# Altium PCB CTH1000.PCBDOC
Units mm, origin at the board's own origin, x right, y up, seen from the top; angles counter-clockwise.
Board outline 50.03 x 82.03 mm, 2 copper layers (TopLayer, BottomLayer); 84 components, 139 nets, 383 pads, 83 vias.
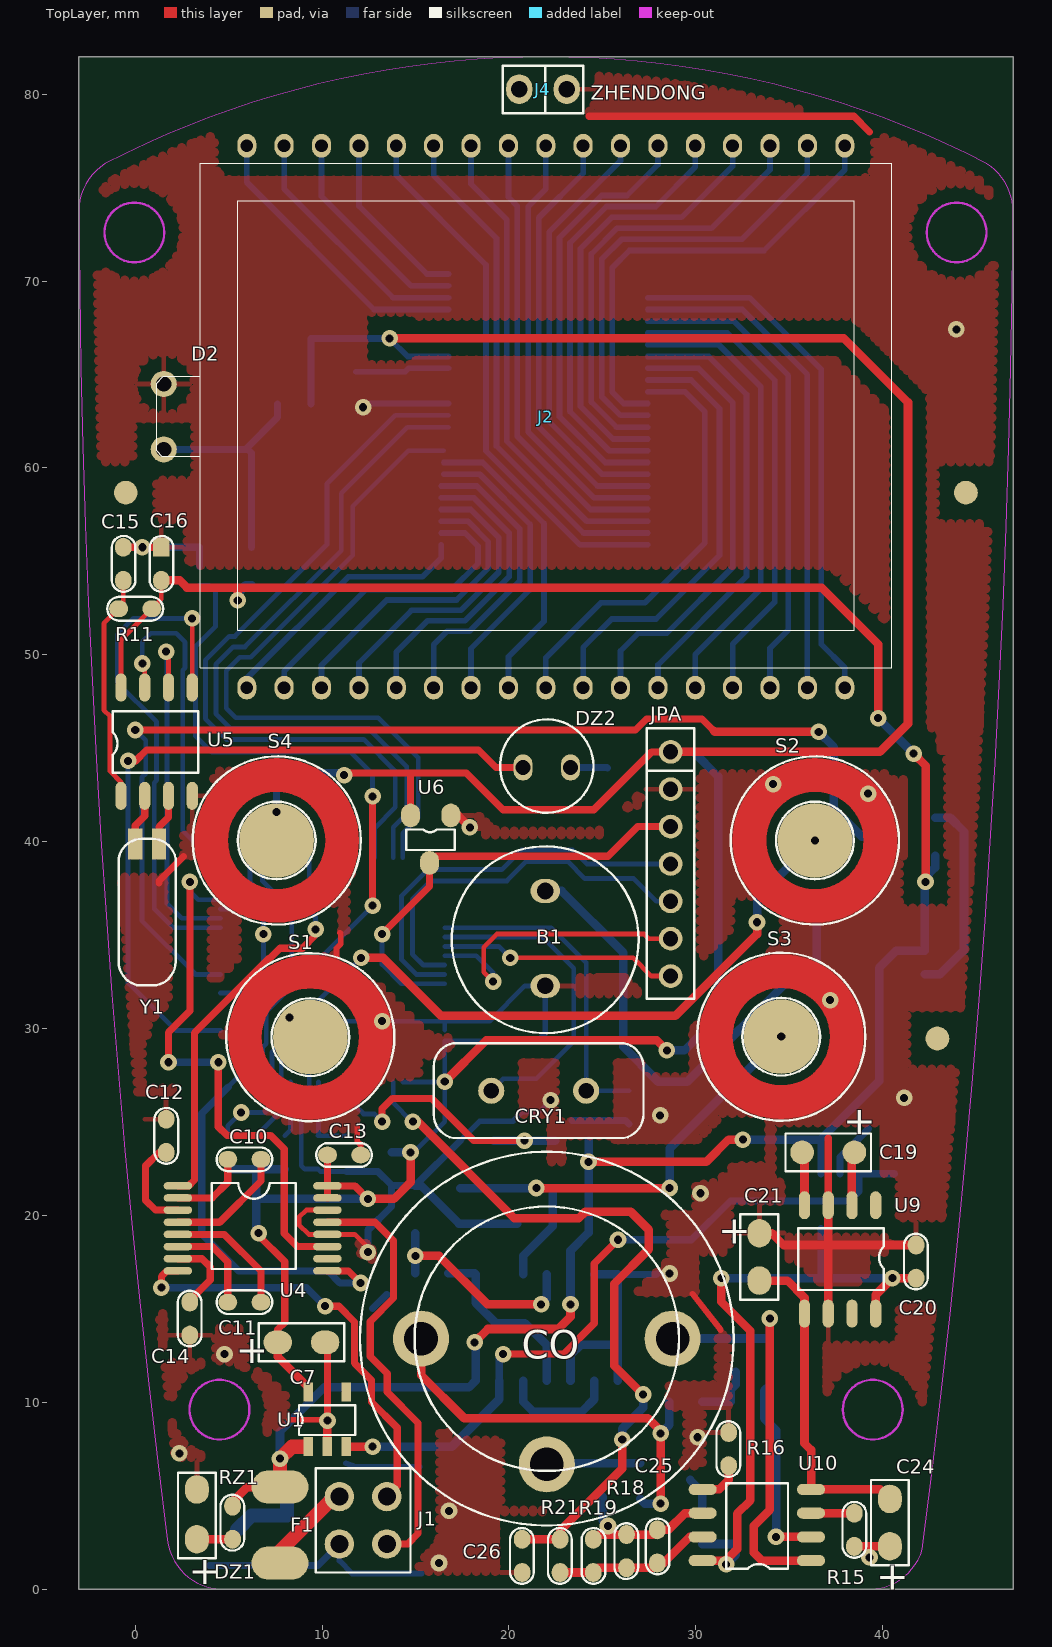
[diagram p0: TopLayer view]
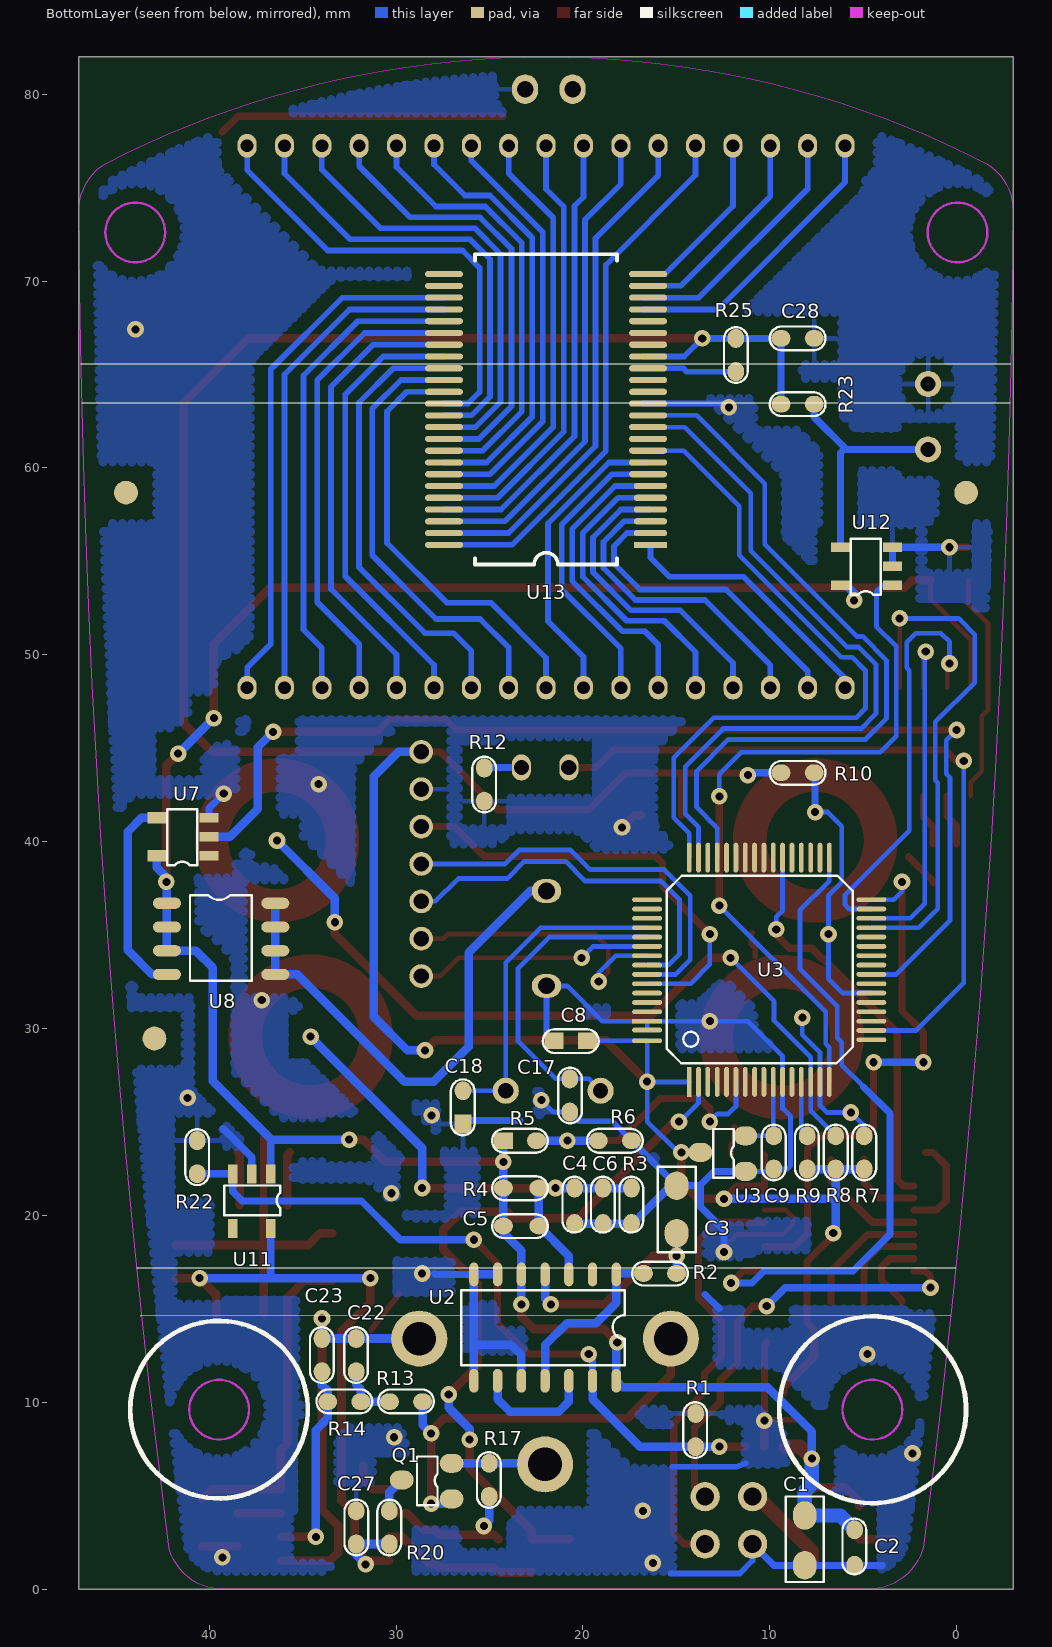
[diagram p1: BottomLayer view, seen from below]

## Layer stack, top to bottom
TopLayer: signal copper 0.0356
Dielectric: core 0.32, FR-4, Dk 4.8
BottomLayer: signal copper 0.0356

## Board outline
-3.035,-0.014 46.99,-0.014 46.99,82.013 -3.035,82.013

## Design rules (kind name [scope] priority, off if disabled: settings)
Clearance [All] p1: gap=0.7
ComponentClearance [All] p1: gap=0.254 collisioncheckmode=0
PolygonConnect [All] p1: connectstyle=Relief reliefconductorwidth=0.254 reliefentries=4 polygonreliefangle="90 Angle"
RoutingVias [All] p1: holewidth=0.711 width=1.27 viastyle="Through Hole" minholewidth=0.711 minwidth=1.27 maxholewidth=0.711 maxwidth=1.27
SolderMaskExpansion [All] p1: expansion=0.102
TestPointUsage [All] p1: valid=0 allowmultiple=FALSE
Testpoint [All] p1: side=15 testpointundercomponent=TRUE minsize=1.016 maxsize=2.54 preferedsize=1.524 minholesize=0.508 maxholesize=1.016 preferedholesize=0.813 testpointgrid=0.025 style=1023 order=1234567890
Width [All] p1: maxlimit=2.54 minlimit=0.102 preferedwidth=0.305
17 further rules are at their usual default settings.

## Components (designator, comment, footprint, x,y, rotation, side; value= is the part's Value field where it differs from the comment)
B1 "蜂鸣器" SSOP-02#1 57.138,23.063 r0 top locked
C1 "4.7uF" 0805AX#1 -9.652,9.525 r270 bottom
C2 "104" 0603A#1 1.778,9.906 r270 bottom
C3 "10uF" 0805AX#2 32.766,13.462 r90 bottom
C4 "104" 0603A#1 16.764,28.194 r270 bottom
C5 "103" 0603A#1 30.988,23.114 r180 bottom
C6 "104" 0603A#1 15.24,28.194 r270 bottom
C7 "4.7uF" 0805AX#2 2.032,30.988 r0 top
C8 "104" 0603A#2 28.27,33.02 r180 bottom
C9 "104" 0603A#3 6.096,30.988 r270 bottom
C10 "104" 0603A#4 13.462,19.304 r180 top
C11 "104" 0603A#4 -1.778,19.05 r0 top
C12 "104" 0603A#3 -2.032,16.637 r90 top
C13 "104" 0603A#4 3.556,26.924 r0 top
C14 "104" 0603A#3 6.604,22.098 r270 top
C15 "104" 0603A#3 -4.318,47.244 r90 top
C16 "104" 0603A#5 -2.286,47.244 r90 top
C17 "22p" 0603A#3 24.384,18.796 r90 bottom
C18 "22p" 0603A#5 22.733,33.401 r270 bottom
C19 "10uF" 0805AX#3 43.942,5.588 r180 top
C20 "104" 0603A#3 45.466,25.146 r270 top
C21 "10uF" 0805AX#2 51.181,24.638 r270 top
C22 "103" 0603A#3 28.448,20.142 r270 bottom
C23 "102" 0603A#3 30.277,20.142 r270 bottom
C24 "10uF" 0805AX#2 58.166,10.414 r270 top
C25 "1.0uF" 0603A#3 24.257,-5.334 r90 top
C26 "1uF" 0603A#3 24.384,9.398 r270 top
C27 "104" 0603A#3 35.814,-4.318 r90 bottom
C28 "103" 0603A#6 16.129,70.612 r180 bottom
CO "ME3" H2S-3 14.953,-1.218 r180 top locked
CRY1 "8MHZ" RAD0.2X#1 24.13,26.67 r180 top
D2 "LED黄色" SIP-2#1 3.531,61.468 r90 top locked
DZ1 "4.7uF" 0805AX#1 -14.478,-2.921 r90 top
DZ2 "LED" SSOP-02#2 -13.176,55.728 r180 top locked
F1 "1A" BX-2 4.572,19.304 r0 top
J1 "Comment" IDC-4 9.271,2.413 r0 top locked
J2 "显示屏接口" JK-34 5.969,79.248 r0 top locked
J4 "ZHENDONG" SIP-2#2 19.406,78.74 r0 top
JPA "CON7" SIP7 28.651,44.806 r270 top
Q1 "J177" SOT223#1 44.552,5.334 r90 bottom
R1 "100K" 0603A#3 10.287,16.129 r270 bottom
R2 "100K" 0603A#3 23.495,20.574 r180 bottom
R3 "100K" 0603A#1 13.716,28.194 r270 bottom
R4 "10K" 0603A#1 30.988,25.146 r180 bottom
R5 "47K" 0603A#7 30.988,27.686 r180 bottom
R6 "47K" 0603A#3 25.908,27.686 r180 bottom
R7 "5.1K" 0603A#3 8.636,15.748 r90 bottom
R8 "5.1K" 0603A#3 10.16,15.748 r90 bottom
R9 "5.1K" 0603A#3 4.318,30.988 r270 bottom
R10 "5.1K" 0603A#3 16.129,47.371 r180 bottom locked
R11 "1K" 0603A#4 7.62,48.768 r180 top
R12 "10R" 0603A#3 21.59,50.673 r270 bottom locked
R13 "10K" 0603A#3 21.844,6.35 r0 bottom
R14 "10K" 0603A#3 25.146,6.35 r0 bottom
R15 "10K" 0603A#3 34.798,-4.445 r90 top
R16 "10K" 0603A#3 35.433,15.113 r270 top
R17 "51" 0603A#3 21.336,13.462 r270 bottom
R18 "22K" 0603A#3 29.972,9.652 r270 top
R19 "10K" 0603A#3 20.828,-5.842 r90 top
R20 "1M" 0603A#3 26.67,10.922 r270 bottom
R21 "10K" 0603A#3 26.416,9.398 r270 top
R22 "100K" 0603A#3 44.323,15.494 r90 bottom
R23 "1K" 0603A#4 0.889,59.715 r0 bottom
R25 "100R" 0603A#3 15.494,58.42 r90 bottom
RZ1 "2K" 0603A#3 8.89,11.176 r270 top
S1 "S4" ANJ02#1 5.158,35.11 r0 top locked
S2 "S4" ANJ02#2 32.158,45.682 r0 top locked
S3 "S4" ANJ02#3 30.38,35.218 r0 top locked
S4 "S4" ANJ02#4 3.329,45.727 r0 top locked
U1 "SE5218F(3.0V)" SOT-23-5#1 18.288,18.415 r0 top
U2 "CD4013" SSOP-14 14.732,-4.572 r0 bottom
U3 "MSP430F149IPM" PGA-64 36.195,5.588 r90 bottom locked
U3 "SE5168DPN(1.8V)" SOT223#2 28.702,22.86 r90 bottom
U4 "MAX3221EAE(or EEAE)" SSOP-S16 -23.876,29.972 r0 top
U5 "DS1302ZN(or ZN+)" SOIC-S8 -6.858,49.784 r0 top
U6 "MAX809SD OR MAX809STR" SOT223#3 16.256,23.876 r180 top
U7 "NC7S04" SOT-23-5#2 50.8,48.26 r90 bottom locked
U8 "SI4435" SOIC-S8 34.925,42.799 r270 bottom
U9 "TP7660" SOIC-S8 45.72,13.208 r180 top
U10 "AD8572" SOIC-S8 28.829,-4.572 r90 top
U11 "SE5218F(3.0V)" SOT-23-5#1 45.72,11.43 r0 bottom
U12 "NC7SZ32" SOT-23-5#3 14.224,62.738 r90 bottom
U13 "HT1621" SSO48 17.272,55.88 r0 bottom
Y1 "32.768KHz" RAD0.2X#2 4.953,33.528 r180 top

## Footprints (in the part's own frame and the unit in brackets; to place one, negate y for a bottom-side part, rotate by r counter-clockwise, add the part's x,y. Pads: shape width x height; smd on the part's side, far side on the other; paste and mask are expansions set on the pad)
0603A#1 [mil]
  oval 40x35 smd: 1(265,-145) 2(340,-145)
  silkscreen extent 241,-170 359,-120
0603A#2 [mil]
  rect 40x35 smd: 1(265,-145) 2(335,-145)
  silkscreen extent 241,-170 359,-120
0603A#3 [mil]
  oval 40x35 smd: 1(265,-145) 2(335,-145)
  silkscreen extent 241,-170 359,-120
0603A#4 [mil]
  oval 40x35 smd: 1(265,-145.4) 2(335,-145.4)
  silkscreen extent 241,-170 359,-120
0603A#5 [mil]
  oval 40x35 smd: 1(265,-145)
  rect 40x35 smd: 2(335,-145)
  silkscreen extent 241,-170 359,-120
0603A#6 [mil]
  oval 40x35 smd: 1(335,-145) 2(265,-145)
  silkscreen extent 241,-170 359,-120
0603A#7 [mil]
  rect 40x35 smd: 1(265,-145)
  oval 40x35 smd: 2(335,-145)
  silkscreen extent 241,-170 359,-120
0805AX#1 [mil]
  oval 60x50 smd: 1(220,-700) 2(325,-700)
  silkscreen extent 180,-740 360,-660
0805AX#2 [mil]
  oval 60x50 smd: 1(220,-700) 2(320,-700)
  silkscreen extent 180,-740 360,-660
0805AX#3 [mil]
  round 50 smd: 1(215,-700) 2(325,-700)
  silkscreen extent 180,-740 360,-660
ANJ02#1 [mm]
  round 4 smd: 1(4.211,-5.573)
ANJ02#2 [mm]
  round 4 smd: 1(4.211,-5.62)
ANJ02#3 [mm]
  round 4 smd: 1(4.189,-5.655)
ANJ02#4 [mm]
  round 4 smd: 1(4.24,-5.665)
BX-2 [mil]
  oval 120x70 smd: 1(125,-545) 2(125,-705)
H2S-3 [mm]
  round 3 hole 1.8: 1(-13.803,-14.621) 2(-7.072,-7.89) 3(-0.341,-14.621)
  silkscreen extent -17.07,-24.62 2.93,-4.62
IDC-4 [mil]
  round 62 hole 38: 1(65,100) 2(165,100) 3(65,0) 4(165,0)
  silkscreen extent 15,-60 215,160
JK-34 [mil]
  oval 40x50 hole 27: 1(0,-1220.87) 2(78.74,-1220.87) 3(157.48,-1220.87) 4(236.22,-1220.87) 5(314.96,-1220.87) 6(393.7,-1220.87) 7(472.44,-1220.87) 8(551.18,-1220.87) 9(629.92,-1220.87) 10(708.66,-1220.87) 11(787.4,-1220.87) 12(866.14,-1220.87) 13(944.88,-1220.87) 14(1023.62,-1220.87) 15(1102.36,-1220.87) 16(1181.1,-1220.87) 17(1259.84,-1220.87) 18(0,-79.14) 19(78.74,-79.14) 20(157.48,-79.14) 21(236.22,-79.14) 22(314.96,-79.14) 23(393.7,-79.14) 24(472.44,-79.14) 25(551.18,-79.14) 26(629.92,-79.14) 27(708.66,-79.14) 28(787.4,-79.14) 29(866.14,-79.14) 30(944.88,-79.14) 31(1023.62,-79.14) 32(1102.36,-79.14) 33(1181.1,-79.14) 34(1259.84,-79.14)
PGA-64 [mm]
  rect 1.6x0.254 smd: 1(21.555,-21.882)
  oval 1.6x0.254 smd: 2(21.555,-22.382) 3(21.555,-22.882) 4(21.555,-23.382) 5(21.555,-23.882) 6(21.555,-24.382) 7(21.555,-24.882) 8(21.555,-25.382) 9(21.555,-25.882) 10(21.555,-26.382) 11(21.555,-26.882) 12(21.555,-27.382) 13(21.555,-27.882) 14(21.555,-28.382) 15(21.555,-28.882) 16(21.555,-29.382) 33(33.555,-29.382) 34(33.555,-28.882) 35(33.555,-28.382) 36(33.555,-27.882) 37(33.555,-27.382) 38(33.555,-26.882) 39(33.555,-26.382) 40(33.555,-25.882) 41(33.555,-25.382) 42(33.555,-24.882) 43(33.555,-24.382) 44(33.555,-23.882) 45(33.555,-23.382) 46(33.555,-22.882) 47(33.555,-22.382) 48(33.555,-21.882)
  oval 0.254x1.6 smd: 17(23.805,-31.632) 18(24.305,-31.632) 19(24.805,-31.632) 20(25.305,-31.632) 21(25.805,-31.632) 22(26.305,-31.632) 23(26.805,-31.632) 24(27.305,-31.632) 25(27.805,-31.632) 26(28.305,-31.632) 27(28.805,-31.632) 28(29.305,-31.632) 29(29.805,-31.632) 30(30.305,-31.632) 31(30.805,-31.632) 32(31.305,-31.632) 49(31.305,-19.632) 50(30.805,-19.632) 51(30.305,-19.632) 52(29.805,-19.632) 53(29.305,-19.632) 54(28.805,-19.632) 55(28.305,-19.632) 56(27.805,-19.632) 57(27.305,-19.632) 58(26.805,-19.632) 59(26.305,-19.632) 60(25.805,-19.632) 61(25.305,-19.632) 63(24.331,-19.632) 64(23.756,-19.632)
  rect 0.254x1.6 smd: 62(24.805,-19.632)
  silkscreen extent 22.56,-30.63 32.59,-20.68
RAD0.2X#1 [mil]
  round 55 hole 32: 1(0,0) 2(200,0)
  silkscreen extent -121,-100 321,100
RAD0.2X#2 [mil]
  rect 30x65 smd: 1(145,-250) 2(195,-250)
  silkscreen extent 110,-261 230,48
SIP7 [mil]
  round 50 hole 32: 1(0,0) 2(78.74,0) 3(157.48,0) 4(236.22,0) 5(314.96,0) 6(393.7,0) 7(472.44,0)
  silkscreen extent -50,-50 520,50
SIP-2#1 [mil]
  round 55 hole 32: A(-18.9,79) K(118.9,79)
SIP-2#2 [mil]
  oval 55x62 hole 35: 1(45,60) 2(145,60)
  silkscreen extent 10,10 180,110
SOIC-S8 [mm]
  oval 0.6x1.5 smd: 1(6.096,-7.334) 2(7.366,-7.334) 3(8.636,-7.334) 4(9.906,-7.334) 5(9.906,-1.534) 6(8.636,-1.534) 7(7.366,-1.534) 8(6.096,-1.534)
  silkscreen extent 5.66,-6.1 10.24,-2.8
SOT223#1 [mil]
  oval 40x50 smd: 1(20,-585) 2(-20,-690) 3(55,-690)
  silkscreen extent -33,-660 69,-617
SOT223#2 [mil]
  oval 40x50 smd: 1(-20,-685) 2(20,-590) 3(55,-685)
  silkscreen extent -33,-660 69,-617
SOT223#3 [mil]
  oval 40x50 smd: 1(-25,-690) 2(20,-590) 3(60,-690)
  silkscreen extent -33,-660 69,-617
SOT-23-5#1 [mil]
  rect 20x40 smd: 1(-355,-425) 2(-315,-425) 3(-275,-425) 4(-275,-310) 5(-355,-310)
  silkscreen extent -375,-400 -257,-337
SOT-23-5#2 [mil]
  rect 20x40 smd: 1(-355,-425) 2(-315,-425) 3(-275,-425)
  rect 25x40 smd: 4(-275,-315) 5(-355,-315)
  silkscreen extent -375,-400 -257,-337
SOT-23-5#3 [mil]
  rect 20x40 smd: 1(-355,-425) 2(-315,-425) 3(-275,-425) 4(-275,-315) 5(-355,-315)
  silkscreen extent -375,-400 -257,-337
SSO48 [mil]
  rect 70x13 smd: 1(-35,0)
  oval 70x13 smd: 2(-35,-24.8) 3(-35,-49.61) 4(-35,-74.41) 5(-35,-99.21) 6(-35,-124.02)
  oval 80x13 smd: 7(-30,-148.82) 8(-30,-173.62) 9(-30,-198.42) 10(-30,-223.23) 11(-30,-248.03) 12(-30,-272.83) 13(-30,-297.64) 14(-30,-322.44) 15(-30,-347.24) 16(-30,-372.05) 17(-30,-396.85) 18(-30,-421.65) 19(-30,-446.46) 20(-30,-471.26) 21(-30,-496.06) 22(-30,-520.86) 23(-30,-545.67) 24(-30,-570.47) 25(400,-570.47) 26(400,-545.67) 27(400,-520.86) 28(400,-496.06) 29(400,-471.26) 30(400,-446.46) 31(400,-421.65) 32(400,-396.85) 33(400,-372.05) 34(400,-347.24) 35(400,-322.44) 36(400,-297.64) 37(400,-272.83) 38(400,-248.03) 39(400,-223.23) 40(400,-198.42) 41(400,-173.62) 42(400,-148.82) 43(400,-124.02) 44(400,-99.21) 45(400,-74.41) 46(400,-49.61) 47(400,-24.8) 48(400,0)
  silkscreen extent 35,-612 335,42
SSOP-02#1 [mil]
  oval 62x50 hole 35: 1(-1385.53,562.78) 2(-1385.53,362.78)
  silkscreen extent -1582,263 -1189,657
SSOP-02#2 [mil]
  oval 40x55 hole 32: A(-1435.75,463) K(-1335.75,463)
  silkscreen extent -1484,362 -1287,558
SSOP-14 [mm]
  oval 0.5x1.27 smd: 1(3.48,-21.412) 2(4.75,-21.412) 3(6.02,-21.412) 4(7.29,-21.412) 5(8.56,-21.412) 6(9.83,-21.412) 7(11.1,-21.412) 8(11.1,-15.722) 9(9.83,-15.722) 10(8.56,-15.722) 11(7.29,-15.722) 12(6.02,-15.722) 13(4.75,-15.722) 14(3.48,-15.722)
  silkscreen extent 3.03,-20.56 11.78,-16.56
SSOP-S16 [mm]
  oval 1.524x0.4 smd: 1(26.161,-8.391) 2(26.161,-9.041) 3(26.161,-9.691) 4(26.161,-10.341) 5(26.161,-10.991) 6(26.161,-11.641) 7(26.161,-12.291) 8(26.161,-12.941) 9(34.162,-12.941) 10(34.162,-12.291) 11(34.162,-11.641) 12(34.162,-10.991) 13(34.162,-10.341) 14(34.162,-9.691) 15(34.162,-9.041) 16(34.162,-8.391)
  silkscreen extent 27.96,-12.84 32.46,-8.24

## Free pads (board coordinates)
  round 1.27 smd: 0(-0.508,58.674) 0(44.45,58.674) 1(42.926,29.464)
  round 1.27 smd far side: 1(42.926,29.464) 2(-0.508,58.674) 2(44.45,58.674)

## Via types
v1: diameter 0.889, hole 0.432, TopLayer to BottomLayer, 83 vias

## Nets (pads, with @x,y where several pads share a name; then routed paths per layer and width w, separated by ;. In a path a pad name is that pad's centre, name@x,y a point inside that pad or via, vN(x,y) a via of type N, cw(c..) or ccw(c..) an arc to the next point about the centre after c; other vN are vias at no path point)
-VCC: C21.2 C24.1 U9.5 U10.4 | length 17.6
  TopLayer w0.457: C21.2 34.9,16.51 35.814,15.596 35.814,7.798 36.163,7.449 U10.4 39.878,5.334 C24.1
-VCC1: 
/BZ: U13.20
/Q2: U2.9 U2.12 | length 6.4
  BottomLayer w0.457: U2.12 20.752,10.033 21.285,9.5 23.901,9.5 24.562,10.16 U2.9
AVCC: C9.1 U3.3@11.303,24.257 U3.10 | length 4.4
  BottomLayer w0.254: U3.10 9.813,24.291 C9.1 U3.3@11.303,24.257
BEEP: B1.1 U8.5 U8.6 U8.7 U8.8 | length 27.9
  BottomLayer w0.457: B1.1 22.815,37.358 26.111,34.061 26.111,29.032 27.991,27.153 29.54,27.153 35.281,32.893 U8.5 U8.8
BEEPO: U7.4 U8.4 | length 10.8
  BottomLayer w0.457: U8.4 43.053,32.893 44.348,34.188 44.348,40.538 43.612,41.275 U7.4
BG: U3.16 U12.1 | length 38.4
  TopLayer w0.381: v1(12.7,36.576) v1(12.7,42.418)
  BottomLayer w0.254: U12.1 3.962,53.721 4.293,53.391 4.293,51.511 3.226,50.444 3.226,45.644 4.089,44.78 11.532,44.78 12.7,43.612 v1(12.7,42.418) ; U3.16 6.813,28.987 7.01,29.185 7.01,30.886 v1(12.7,36.576)
BZ: U13.19
CH4: U3.20
CH4OUT: U3.61
COM1: J2.18 U13.21 | length 15.6
  BottomLayer w0.305: J2.18 5.969,75.286 12.775,68.48 U13.21@16.764,68.48
COM2: J2.19 U13.22 | length 13.5
  BottomLayer w0.305: J2.19 7.969,74.937 13.796,69.11 U13.22@16.764,69.11
COM3: J2.20 U13.23 | length 11.5
  BottomLayer w0.305: J2.20 9.969,74.537 14.766,69.74 U13.23@16.764,69.74
COM4: J2.21 U13.24 | length 9.5
  BottomLayer w0.305: J2.21 11.969,74.01 15.609,70.37 U13.24@16.764,70.37
COOUT: C26.1 R21.1 U3.2@13.813,27.143 | length 39.8
  TopLayer w0.457: v1(14.859,25.019) 15.113,25.019 20.295,19.837 23.724,19.837 24.079,20.193 26.518,20.193 27.483,19.228 27.483,18.186 25.626,16.329 25.626,11.966 v1(27.178,10.414) ; C26.1 R21.1 22.733,3.124 26.06,6.452 v1(26.06,8.001)
  BottomLayer w0.254: U3.2@13.813,27.143 13.813,26.015 14.808,25.019 v1(14.859,25.019)
  BottomLayer w0.457: v1(26.06,8.001) 26.06,8.585 27.178,9.703 v1(27.178,10.414)
CP1: C4.1 C5.2 C6.1 R3.1 R4.2 S3.1 U2.3 | length 27.4
  TopLayer w0.457: v1(21.463,21.463) v1(28.6,21.463)
  BottomLayer w0.457: R3.1 R4.2@21.844,21.463 ; U2.3 20.752,17.831 C5.2 R4.2 ; v1(28.6,21.463) 28.6,23.593 v1@34.569,29.562
  other v1: 34.569,29.566
CS: U3.48 U13.9 | length 37.1
  BottomLayer w0.254: U3.48 14.313,40.449 15.138,41.275 15.138,44.501 13.005,46.634 5.385,46.634 4.877,47.142 4.877,49.149 5.596,49.868 6.18,49.868 11.633,55.321 11.633,57.937 14.616,60.92 U13.9
DATA: U3.45 U13.12 | length 39.9
  BottomLayer w0.254: U3.45 12.813,40.727 13.919,41.834 13.919,43.764 12.217,45.466 4.877,45.466 3.759,46.584 3.759,49.708 5.029,50.978 5.334,50.978 10.262,55.905 10.262,59.157 13.915,62.81 U13.12@16.764,62.81
GND: B1.2 C1.2 C2.2 C3.2 C4.2 C6.2 C7.2 C8.1 C9.2 C12.2 C13.2 C14.2 C15.2 C16.2 C17.1 C18.2 C20.1 C21.1 C24.2 C26.2 C27.2 C28.1 D2.K DZ1.2 J1.3 J4.2 JPA.2 R1.1 R3.2 R6.2 R12.2 R15.1 R16.1 R22.2 U1.2 U2.6 U2.7 U2.8 U2.10 U3.1@11.303,22.352 U3.11 U3.62 U3.63 U4.12 U4.14 U5.4 U6.1 U7.3 U9.3 U9.6 U11.2 U12.2 U12.3 U13.13 | length 246.3
  TopLayer w0.254: U4.14 9.156,20.281 8.763,19.888 8.763,19.507 9.289,18.981 11.753,18.981 12.446,18.288 v1(12.446,18.034)
  TopLayer w0.305: 8.23,9.068 9.982,9.068 v1@10.287,8.763 ; 10.77,33.858 10.77,34.29 10.998,34.519 10.998,35.079 10.949,35.128 ; 11.887,24.74 11.887,23.952 12.065,23.774 C13.2 ; 29.82,15.799 31.318,13.889 31.318,13.868
  TopLayer w0.381: C15.2 C16.2 ; 1.27,37.786 1.27,37.889 2.585,39.204 ; C7.2 10.287,13.081 v1@10.287,8.763 ; 24.282,78.816 38.456,78.816 39.299,77.972 ; U9.3 37.084,24.125
  TopLayer w0.457: U1.2 v1@10.287,8.763 ; U6.1 17.272,41.402 v1(17.907,40.767) ; C21.1 34.061,19.05 34.696,18.415 C20.1 ; U9.6 U9.3 ; R15.1 C24.2 ; v1(39.294,1.702) 39.294,2.286
  TopLayer w1.8: 11.069,40.062 ccw(c7.569,40.062) 11.069,40.062 ; 12.869,29.537 ccw(c9.369,29.537) 12.869,29.537 ; 38.069,29.566 ccw(c34.569,29.566) 38.069,29.566 ; 39.869,40.062 ccw(c36.369,40.062) 39.869,40.062
  BottomLayer w0.254: U3.1@11.303,22.352 9.906,22.352 C9.2 9.068,22.479 8.89,22.657 8.89,25.298 9.313,25.721 9.313,28.515 11.191,30.393 18.963,30.393 20.848,32.278 B1.2 ; U3.63 U3.62 ; C17.1 21.59,25.527 v1(22.225,26.162)
  BottomLayer w0.305: J1.3 10.922,1.524 11.608,0.838 15.316,0.838 ; 11.278,6.731 11.786,6.553 15.215,6.553 ; v1(12.192,63.246) 12.386,63.44 U13.13@16.764,63.44 ; R6.2 18.44,25.044 20.218,25.044 C17.1 ; C8.1 21.946,29.743 B1.2
  BottomLayer w0.381: v1(0.381,55.753) U12.3 U12.2 ; 3.962,1.27 9.779,1.27 J1.3 ; U3.1@11.303,22.352 12.979,22.352 13.741,21.59 ; v1(12.446,18.034) 12.446,19.202 13.716,20.472 13.716,21.59 C3.2 R6.2 ; 12.7,15.011 13.462,15.773 ; 23.368,25.07 26.238,25.07 C18.2 ; U2.7 27.889,16.84 27.94,16.891 ; U11.2 37.719,23.114 39.243,24.638 ; v1@39.37,42.418 40.005,41.783 U7.3
  BottomLayer w0.457: C3.2 15.291,21.59 17.323,19.558 C4.2 ; U2.10 23.292,12.522 23.851,13.081 25.832,13.081 ; U2.6 U2.7 U2.8
  other v1: 16.256,1.397 16.789,4.191 2.362,7.264 30.099,8.128 10.287,9.017 4.775,12.573 28.6,16.891 30.251,21.184 28.092,25.349 41.148,26.289 13.208,30.393 37.186,31.521 39.218,42.57 34.138,43.078 43.942,67.412
H2SOUT: U3.60
IRQ: U13.18
KEY1: R7.2 S1.1 U3.15 | length 8.4
  BottomLayer w0.254: R7.2 4.953,24.79 v1(5.664,25.502) 6.934,25.502 7.313,25.88 7.313,28.725 8.255,29.667 v1(8.255,30.582)
KEY2: R8.2 S2.1 U3.14 | length 42.4
  TopLayer w0.457: v1(12.09,33.782) 13.259,33.782 16.358,30.683 28.905,30.683 33.274,35.052 v1(33.274,35.687)
  BottomLayer w0.254: R8.2 7.813,25.593 7.813,28.463 9.769,30.419 9.769,31.461 v1(12.09,33.782)
  BottomLayer w0.457: v1(33.274,35.687) 33.274,36.967 v1(36.369,40.062)
KEY3: R9.1 U3.13 | length 3
  BottomLayer w0.254: R9.1 8.313,24.569 U3.13
KEY4: R10.2 S4.1 U3.22 | length 14.9
  BottomLayer w0.254: U3.22 6.087,31.893 6.858,32.664 6.858,37.109 6.147,37.821 6.147,40.818 6.909,41.58 v1(7.569,41.58)
  BottomLayer w0.381: v1(7.569,41.58) 7.569,43.637 R10.2
  other v1: 6.858,35.052
KEY5: U3.23
LED1: DZ2.K U3.18 | length 39.6
  TopLayer w0.381: v1(-0.381,44.323) 0.025,44.323 0.61,44.907 18.364,44.907 19.304,43.967 DZ2.K
  BottomLayer w0.254: v1(-0.381,44.323) -0.381,44.069 -0.381,32.436 2.162,29.893 U3.18
LED1+: 
LED2: U3.19
LED2+: 
LED+: D2.A R23.1 U12.4 | length 13
  BottomLayer w0.381: D2.A 6.038,60.988 6.223,60.803 U12.4 ; 5.895,60.988 7.62,62.713 R23.1
NetC4_1: C25.1 R18.2 R19.1 R21.2 U10.7 | length 8.4
  TopLayer w0.457: R21.2 R19.1 24.765,1.143 27.686,1.143 C25.1 28.27,1.397 29.667,2.794 U10.7
NetC10_1: C10.1 U4.4 | length 6.5
  TopLayer w0.381: U4.4 4.518,19.631 6.731,21.844 C10.1
NetC10_2: C10.2 U4.2 | length 4.3
  TopLayer w0.381: U4.2 4.142,20.931 ; 4.115,20.931 4.953,21.769 C10.2
NetC11_1: C11.1 U4.6 | length 5.2
  TopLayer w0.381: U4.6 4.122,18.331 4.953,17.501 C11.1
NetC11_2: C11.2 U4.5 | length 6.9
  TopLayer w0.381: U4.5 4.768,18.981 6.731,17.018 C11.2
NetCH4_2: 
NetCO1_1: C22.1 C23.1 CO.1 U10.1 | length 22.4
  TopLayer w0.457: v1(33.96,14.478) 33.96,4.242 33.096,3.378 33.096,1.956 33.528,1.524 U10.1
  BottomLayer w0.457: CO.1 28.764,13.411 C23.1 v1(33.96,14.478)
NetCO1_2: CO.2 Q1.3 R17.1 | length 5
  BottomLayer w0.457: CO.2 22.084,6.731 Q1.3
NetCO1_3: CO.3 Q1.2 R13.1 | length 23
  TopLayer w0.457: CO.3 15.294,11.452 17.602,9.144 27.432,9.144 28.118,8.458 v1(28.118,4.572)
  BottomLayer w0.457: Q1.2 27.28,4.572 v1(28.118,4.572) ; v1(28.118,8.331) 28.575,8.788 R13.1
NetCZ1_1: C19.1 U9.2 | length 2.9
  TopLayer w0.457: U9.2 38.354,23.241 C19.1
NetCZ1_2: C19.2 U9.4 | length 2.9
  TopLayer w0.457: C19.2 35.814,23.241 U9.4
NetQ1_3: J4.1
NetQ2_1: Q1.1 R20.1 | length 1.9
  BottomLayer w0.457: Q1.1 30.353,5.182 R20.1
NetR4_2: 
NetR5_2: C25.2 R17.2 R18.1 R19.2 U10.6 | length 8.6
  TopLayer w0.457: R19.2 24.765,2.921 27.686,2.921 C25.2 28.524,3.175 29.413,4.064 U10.6 ; 25.298,2.921 v1(25.298,3.378)
  BottomLayer w0.457: R17.2 25.019,3.658 v1(25.298,3.378)
NetR7_1: DZ2.A R12.1 | length 2
  BottomLayer w0.381: DZ2.A 25.248,43.967 R12.1
NetR8_2: 
NetR9_2: C23.2 R14.2 U10.2 | length 11.1
  TopLayer w0.457: v1(34.29,2.794) U10.2
  BottomLayer w0.457: C23.2 33.96,10.922 33.655,10.617 33.655,9.144 34.29,8.509 v1(34.29,2.794)
NetR10_2: C22.2 R13.2 R14.1 | length 3.2
  BottomLayer w0.457: R13.2 R14.1 31.877,10.693 32.131,10.947 C22.2
NetR13_2: C15.1 R11.2 U5.1 | length 12.3
  TopLayer w0.254: U5.1 -0.762,43.18 -1.346,43.764 -1.346,46.711 -1.676,47.041 -1.676,51.674 -0.635,52.715 C15.1
NetR17_2: 
NetR20_1: 
NetR20_2: R15.2 U10.3 | length 2.3
  TopLayer w0.457: U10.3 R15.2
NetR21_2: R16.2 U10.5 | length 2.4
  TopLayer w0.457: U10.5 31.242,5.334 31.75,5.842 R16.2
NetR22_2: 
NetR23_1: 
NetR24_1: 
NetRZ1_2: DZ1.1 RZ1.2 | length 1.9
  TopLayer w0.457: DZ1.1 RZ1.2
NetU4_3: C12.1 U4.3 | length 5.2
  TopLayer w0.381: C12.1 1.27,23.368 0.559,22.657 0.559,20.803 1.08,20.281 U4.3
NetU4_7: C14.1 U4.7 | length 4.2
  TopLayer w0.381: U4.7 3.579,17.681 4.013,17.247 4.013,16.535 2.921,15.443 C14.1
NetU8_1: 
NetU8_6: 
NetU8_9: 
NetU9_5: 
NetU12_1: R2.1 U2.1 U2.11 | length 9.6
  BottomLayer w0.457: R2.1 18.16,16.891 U2.1 18.212,15.316 19.304,14.224 20.853,14.224 22.022,13.056 U2.11
NetU12_4: C3.1 R2.2 U2.4 | length 11.7
  TopLayer w0.457: v1(14.986,17.831) 16.256,17.831 18.847,15.24 v1(21.717,15.24)
  BottomLayer w0.457: R2.2 C3.1 ; v1(21.717,15.24) 22.022,15.545 U2.4
NetUZ1_2: 
NetUZ1_4: 
NetUZ1_6: 
NetY1_1: U5.3 Y1.1 | length 2.8
  TopLayer w0.381: Y1.1 1.27,40.792 1.778,41.3 U5.3
NetY1_2: U5.2 Y1.2 | length 2.8
  TopLayer w0.381: Y1.2 0,40.869 0.508,41.377 U5.2
O2OUT: U3.59
OSCI: U13.15
OSCO: U13.14
POWER: U3.21
Q2/: R1.2 R22.1 U1.3 U2.13 U11.3 | length 39.2
  TopLayer w0.381: v1(19.685,12.573) 22.911,12.573 24.562,14.224 24.562,17.424 v1(25.832,18.694)
  TopLayer w0.457: U1.3 v1(12.7,7.62)
  BottomLayer w0.381: U2.13 19.482,12.37 v1(19.685,12.573) ; v1@25.73,18.694 29.769,18.694 31.852,20.777 38.227,20.777 38.735,21.285 U11.3 R22.1
  BottomLayer w0.457: v1(12.7,7.62) 16.942,7.62 19.482,10.16 U2.13
RD: U13.10
RST: JPA.3 U3.58 U6.2 | length 24
  TopLayer w0.381: v1(13.208,35.052) 15.748,37.592 U6.2 16.104,39.218 25.298,39.218 26.886,40.806 JPA.3
  BottomLayer w0.254: v1(13.208,35.052) 13.208,33.426 14.241,32.393 U3.58
RXD: J1.2 U4.8 | length 23.2
  TopLayer w0.381: v1(1.397,16.129) 1.397,16.739 1.69,17.031 U4.8 ; v1(10.16,15.138) 10.897,15.138 11.735,14.3 11.735,12.09 12.649,11.176 12.649,10.008 14.021,8.636 14.021,5.512 J1.2
  BottomLayer w0.381: v1(1.397,16.129) 9.169,16.129 v1(10.16,15.138)
SCL: U3.37
SCLK: U3.31 U5.7 | length 22.2
  TopLayer w0.254: v1(0.381,49.53) 0.508,49.403 U5.7
  BottomLayer w0.254: v1(0.381,49.53) 0.381,50.698 0.838,51.156 2.184,51.156 2.667,50.673 2.667,49.301 2.54,49.174 2.54,40.589 5.969,37.16 5.969,36.627 5.735,36.393 U3.31
SDA: U3.36
SDATA: U3.30 U5.6 | length 18.7
  TopLayer w0.254: v1(1.651,50.165) 1.778,50.038 U5.6
  BottomLayer w0.254: v1(1.651,50.165) 1.702,50.114 1.702,36.678 2.486,35.893 U3.30
SEG0: J2.8 U13.8 | length 16.3
  BottomLayer w0.305: U13.8 18.6,60.29 21.869,57.02 21.869,51.791 19.969,49.89 J2.8
SEG1: J2.7 U13.7 | length 15.8
  BottomLayer w0.305: U13.7 18.439,59.66 21.133,56.966 21.133,53.492 17.969,50.329 J2.7
SEG2: J2.6 U13.6 | length 16.2
  BottomLayer w0.305: J2.6 15.969,50.538 16.688,51.257 17.882,51.257 20.574,53.95 20.574,56.735 18.279,59.03 U13.6
SEG3: J2.5 U13.5 | length 16.4
  BottomLayer w0.305: J2.5 13.969,50.139 15.646,51.816 17.65,51.816 20.015,54.181 20.015,56.504 18.119,58.4 U13.5
SEG4: J2.4 U13.4 | length 16.4
  BottomLayer w0.305: J2.4 11.969,49.561 14.783,52.375 17.419,52.375 19.456,54.413 19.456,56.272 17.959,57.77 U13.4
SEG5: J2.3 U13.3 | length 16.7
  BottomLayer w0.305: J2.3 9.969,49.441 13.462,52.934 17.187,52.934 18.898,54.644 18.898,56.041 17.798,57.14 U13.3
SEG6: J2.2 U13.2 | length 16.8
  BottomLayer w0.305: J2.2 7.969,49.117 12.344,53.492 16.942,53.492 18.339,54.889 18.339,55.809 17.638,56.51 U13.2
SEG7: J2.1 U13.1 | length 14.3
  BottomLayer w0.305: J2.1 5.969,48.743 11.405,54.178 15.367,54.178 16.383,55.194 U13.1
SEG8: J2.22 U13.48 | length 29.1
  BottomLayer w0.305: J2.22 13.969,75.667 18.771,70.865 18.771,60.909 23.8,55.88 U13.48
SEG9: J2.23 U13.47 | length 27.5
  BottomLayer w0.305: J2.23 15.969,75.649 19.329,72.288 19.329,61.163 23.983,56.51 U13.47
SEG10: J2.24 U13.46 | length 25.9
  BottomLayer w0.305: J2.24 17.969,75.198 19.888,73.279 19.888,61.417 24.165,57.14 U13.46
SEG11: J2.25 U13.45 | length 24.4
  BottomLayer w0.305: J2.25 19.969,74.494 20.447,74.016 20.447,61.697 24.374,57.77 U13.45
SEG12: J2.26 U13.44 | length 23.6
  BottomLayer w0.305: J2.26 21.969,74.928 21.031,73.99 21.031,61.925 24.556,58.4 U13.44
SEG13: J2.27 U13.43 | length 23.2
  BottomLayer w0.305: J2.27 23.969,75.76 21.59,73.381 21.59,62.179 24.739,59.03 U13.43
SEG14: J2.28 U13.42 | length 22.8
  BottomLayer w0.305: J2.28 25.969,76.439 22.149,72.619 22.149,62.484 24.973,59.66 U13.42
SEG15: J2.29 U13.41 | length 23.2
  BottomLayer w0.305: U13.41 25.156,60.29 22.708,62.738 22.708,72.314 24.968,74.574 26.314,74.574 27.969,76.229 J2.29
SEG16: J2.30 U13.40 | length 23.6
  BottomLayer w0.305: U13.40 25.364,60.92 23.266,63.017 23.266,72.034 25.222,73.99 27.861,73.99 29.969,76.098 J2.30
SEG17: J2.31 U13.39 | length 23.8
  BottomLayer w0.305: U13.39 25.572,61.55 23.825,63.297 23.825,71.73 25.502,73.406 29.235,73.406 31.969,76.14 J2.31
SEG18: J2.32 U13.38 | length 24.2
  BottomLayer w0.305: U13.38 25.755,62.18 24.409,63.525 24.409,71.45 25.781,72.822 30.836,72.822 33.969,75.955 J2.32
SEG19: J2.33 U13.37 | length 24.6
  BottomLayer w0.305: U13.37 25.963,62.81 24.968,63.805 24.968,71.171 26.035,72.238 32.461,72.238 35.969,75.745 J2.33
SEG20: J2.34 U13.36 | length 24.7
  BottomLayer w0.305: U13.36 26.146,63.44 25.527,64.059 25.527,70.714 26.441,71.628 33.655,71.628 37.969,75.942 J2.34
SEG21: J2.9 U13.35 | length 23.2
  BottomLayer w0.305: J2.9 21.969,49.833 24.917,52.781 27.28,52.781 30.48,55.982 30.48,63.017 29.427,64.07 U13.35
SEG22: J2.10 U13.34 | length 23.8
  BottomLayer w0.305: J2.10 23.969,50.385 25.502,51.918 27.864,51.918 31.267,55.321 31.267,63.17 29.737,64.7 U13.34
SEG23: J2.11 U13.33 | length 23.9
  BottomLayer w0.305: J2.11 25.969,50.201 26.924,51.156 28.448,51.156 31.979,54.686 31.979,63.5 30.149,65.33 U13.33
SEG24: J2.12 U13.32 | length 23.8
  BottomLayer w0.305: U13.32 30.687,65.96 32.715,63.932 32.715,54.204 27.969,49.457 J2.12
SEG25: J2.13 U13.31 | length 24.5
  BottomLayer w0.305: U13.31 31.225,66.59 33.477,64.338 33.477,53.518 29.969,50.01 J2.13
SEG26: J2.14 U13.30 | length 25.2
  BottomLayer w0.305: U13.30 31.688,67.22 34.214,64.694 34.214,52.807 31.969,50.562 J2.14
SEG27: J2.15 U13.29 | length 25.8
  BottomLayer w0.305: U13.29 32.048,67.85 34.95,64.948 34.95,51.333 33.969,50.352 J2.15
SEG28: J2.16 U13.28 | length 26.7
  BottomLayer w0.305: U13.28 32.485,68.48 35.969,64.996 J2.16
SEG29: J2.17 U13.27 | length 28.4
  BottomLayer w0.305: U13.27 32.871,69.11 36.703,65.278 36.703,50.567 37.969,49.301 J2.17
SEG30: U13.26
SEG31: U13.25
SPEN: U3.38 U4.1 | length 21.8
  TopLayer w0.381: U4.1 2.861,21.581 3.175,21.895 3.175,29.769 7.137,33.731 7.188,33.731 7.75,34.293 8.944,34.293 9.652,35.001 v1(9.652,35.306)
  BottomLayer w0.254: U3.38 9.313,36.306 9.652,35.966 v1(9.652,35.306)
SPRX: U3.33 U4.9 | length 34.4
  TopLayer w0.381: U4.9 11.417,17.031 v1(12.065,16.383)
  BottomLayer w0.254: 4.981,26.876 6.147,28.042 6.147,29.261 6.383,29.497 6.383,31.199 8.382,33.198 8.382,36.322 6.813,37.891 U3.33
  BottomLayer w0.381: 4.981,26.876 3.556,25.451 3.556,18.999 5.537,17.018 10.312,17.018 10.947,16.383 v1(12.065,16.383)
SPTX: U3.32 U4.11 | length 29.7
  TopLayer w0.381: v1(1.778,28.194) 1.778,29.794 2.921,30.937 v1(2.921,37.846) ; v1(4.445,28.194) 4.445,24.74 4.902,24.282 7.239,24.282 7.976,23.546 7.976,19.025 8.669,18.331 U4.11
  BottomLayer w0.254: v1(2.921,37.846) 2.921,37.338 3.366,36.893 U3.32
  BottomLayer w0.381: v1(1.778,28.194) v1(4.445,28.194)
SRST: U3.29 U5.5 | length 27.6
  TopLayer w0.254: U5.5 v1(3.048,51.943)
  BottomLayer w0.254: v1(3.048,51.943) -0.102,51.943 -0.965,51.079 -0.965,48.514 1.143,46.406 1.143,43.282 1.016,43.155 1.016,36.398 2.021,35.393 U3.29
TCK: JPA.4 U3.57 | length 21.8
  BottomLayer w0.254: U3.57 15.037,32.893 14.249,33.68 14.249,37.109 15.647,38.507 19.609,38.507 20.65,39.548 23.419,39.548 24.161,38.806 JPA.4
TCLK: U3.9
TDI: JPA.6 U3.55 | length 15.9
  TopLayer w0.254: v1(19.152,32.512) 18.644,33.02 18.644,34.341 19.355,35.052 27.229,35.052 27.475,34.806 JPA.6
  BottomLayer w0.254: U3.55 18.253,33.893 19.152,32.995 v1(19.152,32.512)
TDO: JPA.7 U3.54 | length 12.7
  TopLayer w0.254: v1(20.066,33.782) 26.638,33.789 27.621,32.806 JPA.7
  BottomLayer w0.254: U3.54 19.455,34.393 v1(20.066,33.782)
TMS: JPA.5 U3.56 | length 20.4
  BottomLayer w0.254: U3.56 15.426,33.393 14.834,33.985 14.834,36.906 15.824,37.897 19.888,37.897 20.93,38.938 23.139,38.938 24.054,38.024 26.671,38.024 27.889,36.806 JPA.5
TXD: J1.4 U4.13 | length 23.1
  TopLayer w0.381: U4.13 12.83,19.631 13.818,18.644 13.818,15.57 12.573,14.326 12.573,12.446 13.487,11.532 13.487,10.541 15.138,8.89 15.138,2.972 14.58,2.413 J1.4
VCC: C7.1 C8.2 C13.1 C28.2 JPA.1 R7.1 R8.1 R9.2 R10.1 R23.2 R25.2 U1.5 U3.1@14.313,27.143 U3.2@13.716,23.368 U3.64 U4.15 U4.16 U6.3 U13.17 | length 171.8
  TopLayer w0.381: v1(6.604,19.05) 6.604,18.923 8.001,17.526 8.001,14.275 7.62,13.894 C7.1 ; U4.15 C13.1@10.286,23.23 ; U4.16 11.744,21.581 v1(12.446,20.879) ; v1(11.176,43.561) 11.278,43.663 17.729,43.663 19.685,41.707 24.536,41.707 27.635,44.806 JPA.1 ; U6.3 14.732,43.663
  TopLayer w0.457: C7.1 7.62,12.446 9.271,10.795 U1.5 ; v1(12.446,20.879) 13.843,20.879 14.732,21.768 v1(14.732,23.368) ; v1(13.614,66.929) 37.922,66.929 41.351,63.5 41.351,46.304 39.853,44.806 JPA.1 ; v1(16.563,27.153) 18.772,29.362 27.915,29.362 v1(28.448,28.829)
  BottomLayer w0.254: U3.1@14.313,27.143 v1@16.553,27.143 ; v1(14.732,23.368) 14.91,23.368 16.563,25.021 U3.64 19.755,29.344 C8.2
  BottomLayer w0.305: v1(13.614,66.929) 14.583,65.96 U13.17@16.764,65.96
  BottomLayer w0.381: v1@6.477,19.177 v1(6.604,19.05) ; R10.1 11.049,43.688 v1(11.176,43.561) ; R23.2 9.398,64.389 C28.2 v1(13.614,66.929)
  BottomLayer w0.457: R7.1 R9.2 ; v1@6.477,19.177 R8.1 ; 6.477,20.879 v1(12.446,20.879) ; U3.2@13.716,23.368 v1(14.732,23.368) ; v1(28.448,28.829) 29.388,28.829 31.191,30.632 31.191,43.485 29.87,44.806 JPA.1
VCC1: C20.2 C27.1 R20.2 U9.8 U10.8 U11.5 | length 36.2
  TopLayer w0.457: U10.8@30.353,1.514 U10.8 v1@31.598,1.524 ; v1(31.369,16.637) 31.369,15.367 32.918,13.818 32.918,4.75 32.207,4.039 32.207,2.134 31.623,1.549 v1(31.623,1.321) ; U9.8 39.624,15.748 v1(40.513,16.637) C20.2
  BottomLayer w0.381: 36.703,16.637 U11.5
  BottomLayer w0.457: R20.2 C27.1 32.131,1.829 v1(31.623,1.321) ; v1(31.369,16.637) v1(40.513,16.637)
VIN: F1.2 J1.1 | length 5
  TopLayer w0.762: F1.2 7.747,2.032 10.668,4.953 J1.1
VIN1: C1.1 C2.1 C5.1 C16.1 F1.1 R4.1 R5.1 R11.1 RZ1.1 U1.1 U2.5 U2.14 U5.8 U7.5 U8.1 U8.2 U8.3 U11.1 U12.5 | length 138.6
  TopLayer w0.254: U5.8 -0.762,50.81 1.397,52.969 C16.1
  TopLayer w0.457: C16.1 2.388,53.975 2.769,53.594 36.728,53.594 39.751,50.571 v1(39.751,46.609) ; RZ1.1 5.207,4.674 5.994,5.461 F1.1 ; v1(5.486,52.908) 5.486,53.594 ; v1(18.161,13.208) 18.872,13.919 22.631,13.919 23.292,14.58 v1(23.292,15.24) ; v1(24.257,22.86) 30.556,22.86 31.75,24.054 v1(32.512,24.054) ; v1(41.656,44.704) 42.291,44.069 v1(42.291,37.846)
  TopLayer w0.762: F1.1 v1(7.747,6.985) 8.382,7.62 U1.1@9.144,7.62
  BottomLayer w0.381: 36.627,24.054 36.703,23.978 U11.1
  BottomLayer w0.457: v1(5.486,52.908) 5.486,53.289 5.918,53.721 U12.5 ; v1(7.747,6.985) 7.747,8.433 10.109,10.795 17.857,10.795 U2.14 v1@18.212,13.157 ; v1(23.292,15.24) 23.292,18.11 24.257,19.075 R5.1 ; v1(32.512,24.054) 36.678,24.054 39.802,27.178 39.802,33.249 40.716,34.163 U8.3 42.259,38.068 42.799,38.608 U7.5 ; v1(39.751,46.609) v1(41.656,44.704)
  BottomLayer w0.762: C2.1 6.223,3.937 C1.1 8.128,5.232 7.747,5.613 v1(7.747,6.985)
VJC: R5.2 R6.1 U3.6 | length 15.8
  TopLayer w0.381: v1(13.208,25.019) 13.208,25.705 13.767,26.264 15.85,26.264 18.11,24.003 v1(20.828,24.003)
  BottomLayer w0.254: U3.6 11.813,25.83 12.217,25.425 12.802,25.425 v1(13.208,25.019)
  BottomLayer w0.457: R6.1 R5.2
VLCD: R25.1 U13.16 | length 5
  BottomLayer w0.305: R25.1 14.453,65.151 14.632,65.33 U13.16@16.764,65.33
WR: U3.47 U13.11 | length 38.7
  BottomLayer w0.254: U3.47 13.813,40.762 14.529,41.478 14.529,44.018 12.497,46.05 5.105,46.05 4.318,46.838 4.318,49.479 5.258,50.419 5.867,50.419 11.024,55.575 11.024,58.649 14.555,62.18 U13.11@16.764,62.18
X1: C17.2 CRY1.2 U3.53 | length 17
  BottomLayer w0.254: U3.53 21.8,34.893 23.47,33.223 23.47,29.312 21.463,27.305 19.685,27.305 CRY1.2
X2: C18.1 CRY1.1 U3.52 | length 17.5
  BottomLayer w0.254: U3.52 22.265,35.393 24.13,33.528 CRY1.1 C18.1
XIN: U3.8
ZHEN: U3.24 U7.2 | length 60.7
  TopLayer w0.381: v1(0,45.974) 26.772,45.974 27.356,46.558 30.328,46.558 30.963,45.923
  TopLayer w0.457: 30.963,45.923 31.013,45.872 v1(36.576,45.872)
  BottomLayer w0.254: v1(0,45.974) 0.559,45.415 0.559,43.637 0.356,43.434 0.356,35.763 3.226,32.893 U3.24
  BottomLayer w0.457: v1(36.576,45.872) 37.389,45.06 37.389,41.758 38.887,40.259 U7.2
ZV+: 
pads on no net: U1.4 U2.2 U3.3@13.313,27.143 U3.4 U3.5 U3.7 U3.12 U3.17 U3.25 U3.26 U3.27 U3.28 U3.34 U3.35 U3.39 U3.40 U3.41 U3.42 U3.43 U3.44 U3.46 U3.49 U3.50 U3.51 U4.10 U7.1 U9.1 U9.7 U11.4

## Polygon pours and split planes (outlines as drawn)
GND on TopLayer (hatched 90Degree grid 0 track 0.508, remove dead copper): -3.048,82.093 46.838,82.093 46.838,-0.127 -4.928,-0.127 -4.928,82.042 -2.946,82.042
GND on MidLayer1 (hatched 90Degree grid 0 track 0.508, remove dead copper): 0.635,2.388
GND on BottomLayer (hatched 90Degree grid 0 track 0.508, remove dead copper): -3.378,82.194 47.168,82.194 47.168,-0.279 -5.258,-0.279 -5.258,82.22 -3.429,82.22

## Keep-outs
KeepOutLayer:
  circle w0.127: c39.465,9.6 r1.6
  circle w0.127: c4.507,9.6 r1.6
  circle w0.127: c-0.048,72.6 r1.6
  circle w0.127: c43.952,72.6 r1.6
  lines w0.025: -3.023,73.735 ccw(c596.962,78.06) 1.721,2.642 ; -3.023,73.736 cw(c-0.023,73.736) -1.624,76.273 cw(c21.977,30.5) 45.569,76.279 cw(c43.977,73.736) 46.977,73.736 ; 1.722,2.641 ccw(c4.702,2.993) 4.478,0.002 ; 4.477,0 39.477,0 ; 39.478,-0.002 ccw(c39.252,2.99) 42.127,2.134 ; 42.127,2.131 ccw(c-553.004,78.412) 46.977,73.741

## Silkscreen, mask and mechanical layers (free items; w line width, h text height)
TopOverlay:
  circle w0.127: c34.569,29.562 r4.5
  circle w0.127: c36.369,40.062 r4.5
  circle w0.127: c7.569,40.062 r4.5
  circle w0.127: c9.369,29.537 r4.5
  circle w0.127: c9.369,29.537 r2.081
  circle w0.127: c34.569,29.562 r2.081
  circle w0.127: c36.369,40.062 r2.081
  circle w0.127: c7.569,40.062 r2.081
  lines w0.025: 3.477,60.63 1.422,60.63 1.143,60.909 1.143,64.541 1.499,64.897 3.477,64.897 ; 3.477,49.3 40.477,49.3 40.477,76.3 3.477,76.3 3.477,49.3 ; 5.477,51.3 38.477,51.3 38.477,74.3 5.477,74.3 5.477,51.3
  text "+" at 37.897,24.333 h1.52
  text "+" at 31.191,18.491 h1.52
  text "+" at 5.385,12.09 h1.52
  text "+" at 2.87,0.254 h1.52
  text "+" at 39.649,-0.025 h1.52
BottomOverlay:
  circle w0.254: c4.489,9.6 r5
  circle w0.254: c39.471,9.6 r4.75
  lines w0.025: -2.896,65.557 46.863,65.557 ; -2.87,63.449 46.812,63.449 ; 0.051,17.17 43.866,17.17 ; 0.33,14.63 43.688,14.605
TopSolder:
  circle w1.8: c34.569,29.566 r3.5
  circle w1.8: c9.373,29.54 r3.5
  circle w1.8: c36.369,40.062 r3.501
  circle w1.8: c7.569,40.062 r3.5